# Altium PCB PCB1.PcbDoc
Units mm, origin at the board's own origin, x right, y up, seen from the top; angles counter-clockwise.
Board outline 50 x 50 mm, 2 copper layers (Top Layer, Bottom Layer); 16 components, 18 nets, 76 pads, 18 vias.
Unrouted connection lines stored in the file: 1.
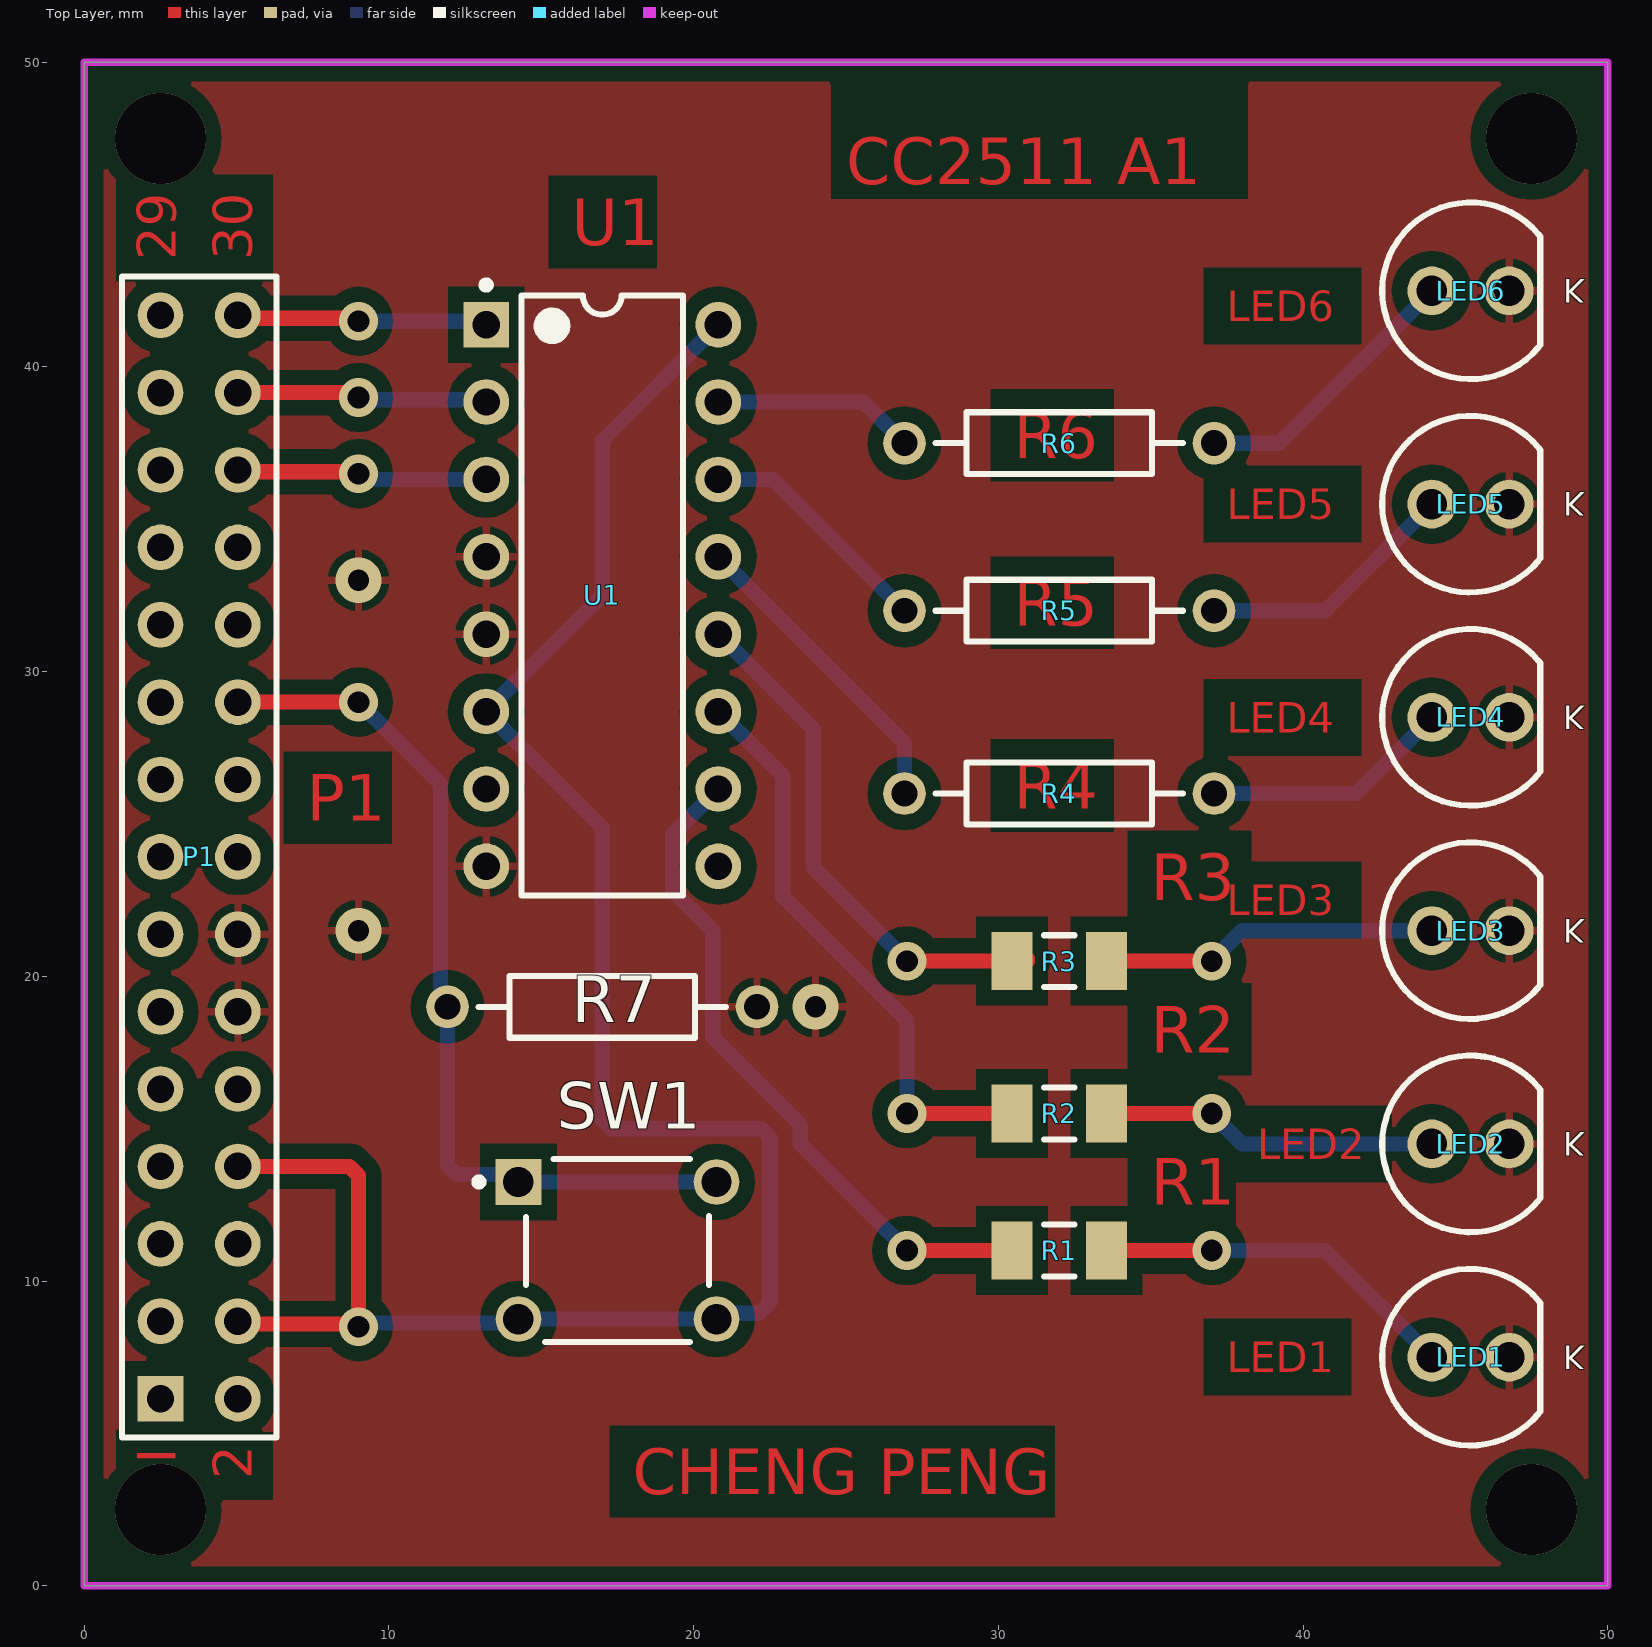
[diagram p0: Top Layer view]
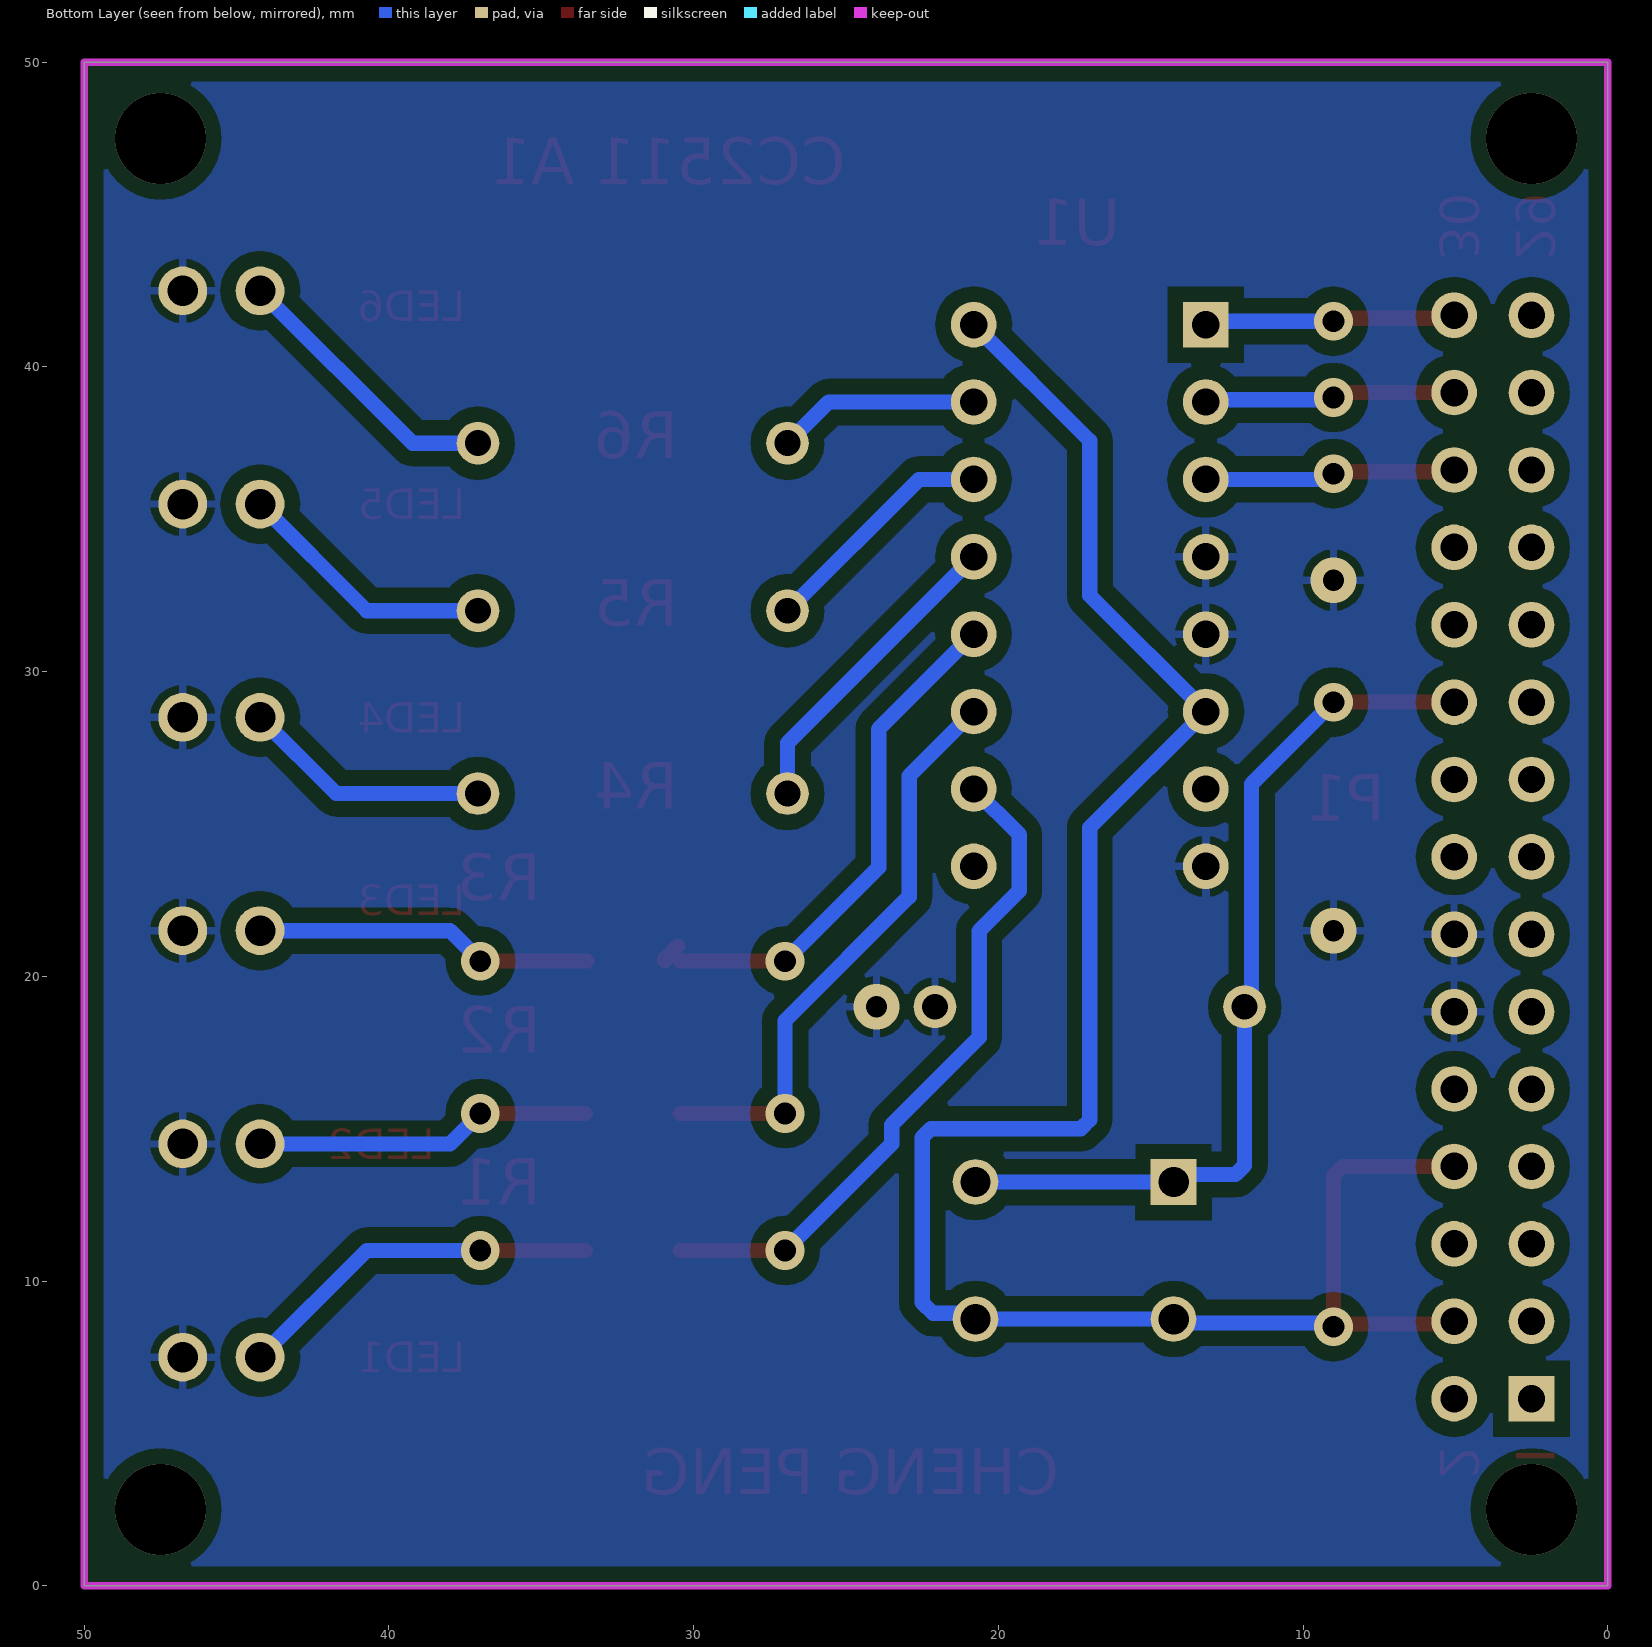
[diagram p1: Bottom Layer view, seen from below]

## Layer stack, top to bottom
Top Solder: solder mask 0.0102, Solder Resist, Dk 3.5
Top Layer: signal copper 0.0356
Dielectric 1: dielectric 0.32, FR-4, Dk 4.8
Bottom Layer: signal copper 0.0356
Bottom Solder: solder mask 0.0102, Solder Resist, Dk 3.5

## Board outline
0,0 50,0 50,50 0,50

## Design rules (kind name [scope] priority, off if disabled: settings)
Clearance [All] p1: gap=0.5 ignorepadtopadclearanceinfootprint=FALSE
HoleSize [All] p1: absolutevalues=TRUE maxlimit=3 minlimit=0 maxpercent=80.000 minpercent=20.000
PolygonConnect [All] p1: connectstyle=Relief reliefconductorwidth=0.254 reliefentries=4 polygonreliefangle="90 Angle" airgapwidth=0.254
RoomDefinition Sheet1 [InComponentClass('Sheet1')] p1: confinementstyle=ConfineIn formatcopy=TRUE lockcomponents=FALSE outline 0,0 50,0 50,50 0,50
RoutingVias [All] p1: holewidth=0.711 width=1.27 viastyle="Through Hole" minholewidth=0.711 minwidth=1.27 maxholewidth=0.711 maxwidth=1.27
SilkToSilkClearance [All] p1: silktosilkclearance=0
SilkToSolderMaskClearance [IsPad] p1: minsilkscreentomaskgap=0 clearancetoexposedcopper=TRUE
SolderMaskExpansion [All] p1: expansion=0.102
Width [All] p1: maxlimit=0.5 minlimit=0.1 preferedwidth=0.5 minimp=50.000000 maximp=50.000000 favimp=50.000000
27 further rules are at their usual default settings.

## Components (designator, comment, footprint, x,y, rotation, side; value= is the part's Value field where it differs from the comment)
LED1 "151053RS03000" "Type 5mm" 45.5,7.5 r0 top
LED2 "151053RS03000" "Type 5mm" 45.5,14.5 r0 top
LED3 "151053RS03000" "Type 5mm" 45.5,21.5 r0 top
LED4 "151053RS03000" "Type 5mm" 45.5,28.5 r0 top
LED5 "151053RS03000" "Type 5mm" 45.5,35.5 r0 top
LED6 "151053RS03000" "Type 5mm" 45.5,42.5 r0 top
P1 "Header 15X2" HDR2X15 2.5,6.14 r90 top
R1 "220R 5% 1206(3216)" RESC1206(3216)_M 32,11 r180 top value="220.00 Ohm"
R2 "220R 5% 1206(3216)" RESC1206(3216)_M 32,15.5 r180 top value="220.00 Ohm"
R3 "220R 5% 1206(3216)" RESC1206(3216)_M 32,20.5 r180 top value="220.00 Ohm"
R4 "Res2" AXIAL-0.4 32,26 r180 top value=220
R5 "Res2" AXIAL-0.4 32,32 r180 top value=220
R6 "Res2" AXIAL-0.4 32,37.5 r180 top value=220
R7 "Res2" AXIAL-0.4 17,19 r180 top value=10k
SW1 "B3F-1000" OMRON-B3F-1000-4_V 17.5,11 r0 top
U1 "CD74HC238E" N0016A 17,32.5 r0 top

## Footprints (in the part's own frame and the unit in brackets; to place one, negate y for a bottom-side part, rotate by r counter-clockwise, add the part's x,y. Pads: shape width x height; smd on the part's side, far side on the other; paste and mask are expansions set on the pad)
AXIAL-0.4 [mm] "Axial Device, Thru-Hole; 2 Leads; 0.4 in Pin Spacing"
  round 1.4 hole 0.85: 1(-5.08,0) 2(5.08,0)
  silkscreen extent -4.06,-1.02 4.06,1.02
HDR2X15 [mm] "Connector; Header; 15x2 Position"
  rect 1.5x1.5 hole 0.9: 1(0,0)
  round 1.5 hole 0.9: 2(0,-2.54) 3(2.54,0) 4(2.54,-2.54) 5(5.08,0) 6(5.08,-2.54) 7(7.62,0) 8(7.62,-2.54) 9(10.16,0) 10(10.16,-2.54) 11(12.7,0) 12(12.7,-2.54) 13(15.24,0) 14(15.24,-2.54) 15(17.78,0) 16(17.78,-2.54) 17(20.32,0) 18(20.32,-2.54) 19(22.86,0) 20(22.86,-2.54) 21(25.4,0) 22(25.4,-2.54) 23(27.94,0) 24(27.94,-2.54) 25(30.48,0) 26(30.48,-2.54) 27(33.02,0) 28(33.02,-2.54) 29(35.56,0) 30(35.56,-2.54)
  silkscreen extent -1.27,-3.81 36.83,1.27
N0016A [mm] "DIP, 16-Leads, Body 19.7x6.6mm, Pitch 2.54mm"
  rect 1.5x1.5 hole 0.9: 1(-3.81,8.89)
  round 1.5 hole 0.9: 2(-3.81,6.35) 3(-3.81,3.81) 4(-3.81,1.27) 5(-3.81,-1.27) 6(-3.81,-3.81) 7(-3.81,-6.35) 8(-3.81,-8.89) 9(3.81,-8.89) 10(3.81,-6.35) 11(3.81,-3.81) 12(3.81,-1.27) 13(3.81,1.27) 14(3.81,3.81) 15(3.81,6.35) 16(3.81,8.89)
  silkscreen extent -3.93,-9.85 2.65,10.31, body extent -3.95,-9.85 3.95,9.85, height 5.08
OMRON-B3F-1000-4_V [mm] "TH, 4-Leads, Body 6x6mm"
  rect 1.5x1.5 hole 1 paste+0: 1(-3.25,2.25)
  round 1.5 hole 1 paste+0: 2(3.25,2.25) 3(-3.25,-2.25) 4(3.25,-2.25)
  silkscreen extent -4.67,-3 3,3, body extent -3,-3 3,3, height 4.5
RESC1206(3216)_M [mm] "Chip Resistor, Body 3.2x1.6mm, IPC Low Density"
  rect 1.35x1.9 smd: 1(-1.55,0) 2(1.55,0)
  silkscreen extent -0.5,-0.85 0.5,0.85, body extent -1.67,-0.87 1.67,0.87, height 0.75
"Type 5mm" [mm] "THT, LED-5mm, 2pin- Body 5.8mm"
  round 1.6 hole 1: 1(1.27,0) 2(-1.27,0)
  silkscreen extent -2.9,-2.9 2.29,2.9, body extent -2.9,-2.9 2.5,2.9, height 11.7

## Part data
LED1 LED2 LED3 LED4 LED5 LED6: library part CMP-1489-00007-1, "THT LED round mono-color waterclear,  WL-TMRW ,Red", Emitting color=Red, Manufacturer="Wuerth Elektronik", ComponentLink1Description="Manufacturer URL", ComponentLink1URL=http://www.we-online.com, ComponentLink2Description=Datasheet, ComponentLink2URL=http://katalog.we-online.de/pbs/datasheet/7448042001.pdfhttp://katalog.we-online.de/pbs/datasheet/7448042001.pdfhttp://katalog.we-online.de/pbs/datasheet/7448042001.pdfhttp://katalog.we-online.de/pbs/datasheet/151053RS03000.pdf, PackageReference="Type 5mm", PartNumber=151053RS03000
P1: "Header, 15-Pin, Dual row", LatestRevisionDate=17-Jul-2002, LatestRevisionNote="Re-released for DXP Platform.", Publisher="Altium Limited"
R1 R2 R3: library part CMP-1014-00058-1, "220R 0.25W 5% 1206 (3216 Metric)  SMD", Case-EIA=1206, Case-Metric=3216, Power="0.25 W", Tolerance="5 %", Technology=SMT
R4 R5 R6 R7: "Resistor", LatestRevisionDate=17-Jul-2002, LatestRevisionNote="Re-released for DXP Platform.", PackageDescription="Axial Device, Thru-Hole; 2 Leads; 0.4 in Pin Spacing", PackageReference=AXIAL-0.4, Published=8-Jun-2000, Publisher="Altium Limited"
SW1: library part CMP-1677-00002-1, "Tactile Switch, SPST-NO, 0.05 A, 5 to 24 V, -25 to 70 degC, 4-Pin THD, RoHS, Bulk", Capacitance="-45 f", Current Rating="1.5 A", Max Operating Temperature="70 degC", Min Operating Temperature="-40 degC", Package Quantity=1080, Voltage Rating="150 V", ComponentLink1Description="Manufacturer URL", ComponentLink1URL=http://www.omron.com/, ComponentLink2Description=Datasheet, ComponentLink2URL=http://www.omron.com/ecb/products/pdf/en-b3f.pdf, Contact Material=Brass, Contact Plating=Gold, DatasheetVersion=Jan-15, Gender=Female, Height="14.99 mm", Lead Pitch="1.27 mm", Length="18.34 mm", Mount="Through Hole", PackageDescription="4-Pin Through Hole Device, Body 6 x 6 mm", PackageReference=B3F-1000, Packaging=Tray, Pins=8, Radiation Hardening=No, RoHSCompliant=true, Shielding=Shielded, Width="25.4 mm"
U1: library part CMP-1633-00674-2, "High Speed CMOS Logic 3-to-8 Line Decoder Demultiplexer Inverting and Non-Inverting, N0016A, TUBE", F @ Nom Voltage(Max)(Mhz)=28, Generic Part Number=CD74HC238, ICC @ Nom Voltage(Max)(mA)=0.08, Manufacturer="Texas Instruments", Operating Temperature Range(C)="-55 to 125", Rating=Catalog, tpd @ Nom Voltage(Max)(ns)=30, Voltage(Nom)(V)=3.3,5, Bits(#)=8, Channels(#)=1, Code_JEDEC=MS-001, Configuration=3:8, DatasheetVersion=SCHS147I, Function=Decoder/Demultiplexer, Input Type=LVTTL/CMOS, Output Drive (IOL/IOH)(Max)(mA)=5.2/-5.2, Output Type=CMOS, PackageReference=N0016A, Schmitt Trigger=No, Technology Family=HC, Type=Standard, VCC(Max)(V)=6, VCC(Min)(V)=2

## Via types
v1: diameter 1.27, hole 0.711, Top Layer to Bottom Layer, 11 vias
v2: diameter 3, hole 3, Top Layer to Bottom Layer, 4 vias
v3: diameter 1.5, hole 0.7, Top Layer to Bottom Layer, 3 vias

## Nets (pads, with @x,y where several pads share a name; then routed paths per layer and width w, separated by ;. In a path a pad name is that pad's centre, name@x,y a point inside that pad or via, vN(x,y) a via of type N, cw(c..) or ccw(c..) an arc to the next point about the centre after c; other vN are vias at no path point)
GND: LED1.1 LED2.1 LED3.1 LED4.1 LED5.1 LED6.1 P1.12 P1.14 R7.1 U1.4 U1.5 U1.8
  other v3: 24,19 9,21.5 9,33
LED1: P1.30 U1.1 | length 8.1
  Top Layer w0.5: P1.30 5.14,41.6 v1@8.9,41.6
  Bottom Layer w0.5: v1(9,41.5) 13.08,41.5 U1.1
LED2: P1.28 U1.2 | length 8.3
  Top Layer w0.5: P1.28 8.84,39.16 v1(9,39)
  Bottom Layer w0.5: v1(9,39) 9.075,38.925 13.115,38.925 U1.2
LED3: P1.26 U1.3 | length 8.3
  Top Layer w0.5: P1.26 5.1,36.56 8.94,36.56 v1(9,36.5)
  Bottom Layer w0.5: v1(9,36.5) 9.19,36.31 U1.3
NetLED1_2: LED1.2 R1.1 | length 12.1
  Top Layer w0.5: R1.1 v1(37,11)
  Bottom Layer w0.5: v1(37,11) 40.73,11 LED1.2
NetLED2_2: LED2.2 R2.1 | length 11.1
  Top Layer w0.5: R2.1 v1(37,15.5)
  Bottom Layer w0.5: v1(37,15.5) 38,14.5 LED2.2
NetLED3_2: LED3.2 R3.1 | length 11.1
  Top Layer w0.5: R3.1@33.5,20.5 R3.1 v1(37,20.5)
  Bottom Layer w0.5: v1(37,20.5) 38,21.5 LED3.2
NetLED4_2: LED4.2 R4.1 | length 8.2
  Bottom Layer w0.5: R4.1 41.73,26 LED4.2
NetLED5_2: LED5.2 R5.1 | length 8.6
  Bottom Layer w0.5: R5.1 40.73,32 LED5.2
NetLED6_2: LED6.2 R6.1 | length 9.2
  Bottom Layer w0.5: R6.1 39.23,37.5 LED6.2
NetR1_2: R1.2 U1.10 | length 22.4
  Top Layer w0.5: v1(27,11) R1.2
  Bottom Layer w0.5: U1.10 19.31,24.65 19.31,22.811 20.63,21.491 20.63,17.991 23.5,15.121 23.5,14.5 v1(27,11)
NetR2_2: R2.2 U1.11 | length 19.2
  Top Layer w0.5: v1(27,15.5) R2.2
  Bottom Layer w0.5: U1.11 22.927,26.573 22.927,22.614 27,18.541 v1(27,15.5)
NetR3_2: R3.2 U1.12 | length 17.4
  Top Layer w0.5: v1(27,20.5) R3.2 ; R3.2@30.525,21 30.95,20.575 R3.2@30.95,20.5
  Bottom Layer w0.5: U1.12 23.927,28.113 23.927,23.573 v1(27,20.5)
NetR4_2: R4.2 U1.13 | length 10.3
  Bottom Layer w0.5: U1.13 26.92,27.66 R4.2
NetR5_2: R5.2 U1.14 | length 7.9
  Bottom Layer w0.5: U1.14 22.61,36.31 R5.2
NetR6_2: R6.2 U1.15 | length 6.9
  Bottom Layer w0.5: U1.15 25.57,38.85 R6.2 R6.2@26.748,37.328
S1: P1.20 R7.2 SW1.1 SW1.2 | length 29.4
  Top Layer w0.5: P1.20 v1(9,29)
  Bottom Layer w0.5: v1(9,29) 11.69,26.31 11.69,19.474 11.92,19.244 R7.2 11.92,13.793 12.213,13.5 14,13.5 SW1.1 SW1.2
VCC: P1.4 P1.8 SW1.3 SW1.4 U1.6 U1.16 | length 69.1
  Top Layer w0.5: P1.4 5.13,8.59 8.91,8.59 v1(9,8.5) 9,13.467 8.707,13.76 P1.8
  Bottom Layer w0.5: v1@9.125,8.375 v1(9,8.5) 9.125,8.625 14.125,8.625 SW1.3 SW1.4 20.941,8.941 22.148,8.941 22.5,9.293 22.5,14.707 22.207,15 17.293,15 17,15.293 17,24.88 U1.6 17,32.5 17,37.58 U1.16
pads on no net: P1.1 P1.2 P1.3 P1.5 P1.6 P1.7 P1.9 P1.10 P1.11 P1.13 P1.15 P1.16 P1.17 P1.18 P1.19 P1.21 P1.22 P1.23 P1.24 P1.25 P1.27 P1.29 U1.7 U1.9
copper on no net:
  other v2: 2.5,2.5 47.5,2.5 2.5,47.5 47.5,47.5

## Polygon pours and split planes (outlines as drawn)
GND on Bottom Layer "GND_L02_P006" (solid, pour order 6): 0,0 50,0 50,50 0,50
GND on Top Layer "GND_L01_P007" (solid, pour order 7): 0,0 50,0 50,50 0,50

## Keep-outs
Keep-Out Layer:
  the board outline again, w0.25

## Other copper
Top Layer:
  text "CC2511 A1" at 25,46 h1.52
  text "CHENG PENG" at 18,3 h1.5

## Text inside footprints (layer, text, board x,y; h text height)
LED1: Mechanical 15 "K" at 48.548,7.881 h0.76 r180; Top Overlay "K" at 48.548,7.881 h0.76 r180
LED2: Mechanical 15 "K" at 48.548,14.881 h0.76 r180; Top Overlay "K" at 48.548,14.881 h0.76 r180
LED3: Mechanical 15 "K" at 48.548,21.881 h0.76 r180; Top Overlay "K" at 48.548,21.881 h0.76 r180
LED4: Mechanical 15 "K" at 48.548,28.881 h0.76 r180; Top Overlay "K" at 48.548,28.881 h0.76 r180
LED5: Mechanical 15 "K" at 48.548,35.881 h0.76 r180; Top Overlay "K" at 48.548,35.881 h0.76 r180
LED6: Mechanical 15 "K" at 48.548,42.881 h0.76 r180; Top Overlay "K" at 48.548,42.881 h0.76 r180
P1: Top Layer "I" at 3,4 h1.27 r90; Top Layer "2" at 5.5,3.5 h1.27 r90; Top Layer "29" at 3,43.5 h1.27 r90; Top Layer "30" at 5.5,43.5 h1.27 r90